# EAGLE board rolling resistance (EAGLE 9.5.1)

Size 160 x 100 mm. Coordinates in mm from the lower left corner, seen from the top.
Outline: 0,0 160,0 160,100 0,100 0,0
Copper layers (1*16): Top 0.035mm / dielectric 1.5mm / Bottom 0.035mm
Design rules "default": minimum track width 6mil, minimum drill 0.35mm, track to track 6mil, track to pad 6mil, pad to pad 6mil, via to via 6mil, smd to smd 6mil, copper to edge 40mil, drill to drill 6mil, minimum pad ring 10mil, minimum via ring 8mil, stop-mask expansion 4mil, vias tented up to drill 0mil, thermal gap 10mil

## Footprints (pad centres in the part's own frame; a part is rotated, then mirrored left to right if it is on the bottom)
1X03 = drill 1.016 long: 1 -2.54,0; 2 0,0; 3 2.54,0
1X02 = drill 1.016 long: 1 -1.27,0; 2 1.27,0
SML0805 = smd 1.2 x 1.2: A 1.05,0; C -1.05,0
ARDUINO-NANO-3.0 = drill 1 square: J1.1 17.78,7.62 | drill 1: J1.2 15.24,7.62; J1.3 12.7,7.62; J1.4 10.16,7.62; J1.5 7.62,7.62; J1.6 5.08,7.62; J1.7 2.54,7.62; J1.8 0,7.62; J1.9 -2.54,7.62; J1.10 -5.08,7.62; J1.11 -7.62,7.62; J1.12 -10.16,7.62; J1.13 -12.7,7.62; J1.14 -15.24,7.62; J1.15 -17.78,7.62; J2.1 17.78,-7.62; J2.2 15.24,-7.62; J2.3 12.7,-7.62; J2.4 10.16,-7.62; J2.5 7.62,-7.62; J2.6 5.08,-7.62; J2.7 2.54,-7.62; J2.8 0,-7.62; J2.9 -2.54,-7.62; J2.10 -5.08,-7.62; J2.11 -7.62,-7.62; J2.12 -10.16,-7.62; J2.13 -12.7,-7.62; J2.14 -15.24,-7.62; J2.15 -17.78,-7.62 | hole 1.651: -20.32,7.62; -20.32,-7.62; 20.32,-7.62; 20.32,7.62
R0805 = smd 1.3 x 1.5: 1 -0.95,0; 2 0.95,0

## Placement (x,y rotation side)
JP1  WHEEL  [1X03]  -26.67,29.21 0 top  (outside the outline)
JP2  ROLLER  [1X03]  -17.78,29.21 0 top  (outside the outline)
JP3  GND  [1X02]  -34.29,29.21 0 top  (outside the outline)
JP4  5V  [1X02]  -40.64,29.21 0 top  (outside the outline)
LED1  WHEEL  [SML0805]  -33.02,35.56 0 top  (outside the outline)
LED2  ROLLER  [SML0805]  -25.4,35.56 0 top  (outside the outline)
M1  ARDUINO-NANO-3.0  [ARDUINO-NANO-3.0]  -35.56,12.7 0 top  (outside the outline)
R1  470  [R0805]  -46.99,27.94 0 top  (outside the outline)
R2  470  [R0805]  -16.51,36.83 0 top  (outside the outline)

## Library data of the parts
JP1-JP4 = pinhead
LED1 LED2 = led
M1 = diy-modules
R1 R2 = rcl; SPICEPREFIX: R

## Nets
3V3: M1.J2.14
+5V: JP1.3 JP2.3 JP4.1 JP4.2 M1.J2.4
GND: JP1.1 JP2.1 JP3.1 JP3.2 M1.J1.4 M1.J2.2 R1.1 R2.1
N$1: LED1.C R1.2
N$2: LED2.C R2.2
RLR_LED: LED2.A M1.J1.8
ROLLER: JP2.2 M1.J1.6
VIN: M1.J2.1
WHEEL: JP1.2 M1.J1.5
WHL_LED: LED1.A M1.J1.7

## Tracks (layer width: path | path; a pad name or v marks a point on that pad's centre or on a via)
+5V  (4 unrouted)
GND  (7 unrouted)
N$1  (1 unrouted)
N$2  (1 unrouted)
RLR_LED  (1 unrouted)
ROLLER  (1 unrouted)
WHEEL  (1 unrouted)
WHL_LED  (1 unrouted)